# Altium PCB USBasp_下载线.PCBDOC
Units mm, origin at the board's own origin, x right, y up, seen from the top; angles counter-clockwise.
Board outline 152.4 x 101.6 mm, 2 copper layers (Top Layer, Bottom Layer); 21 components, 22 nets, 84 pads, 23 vias.
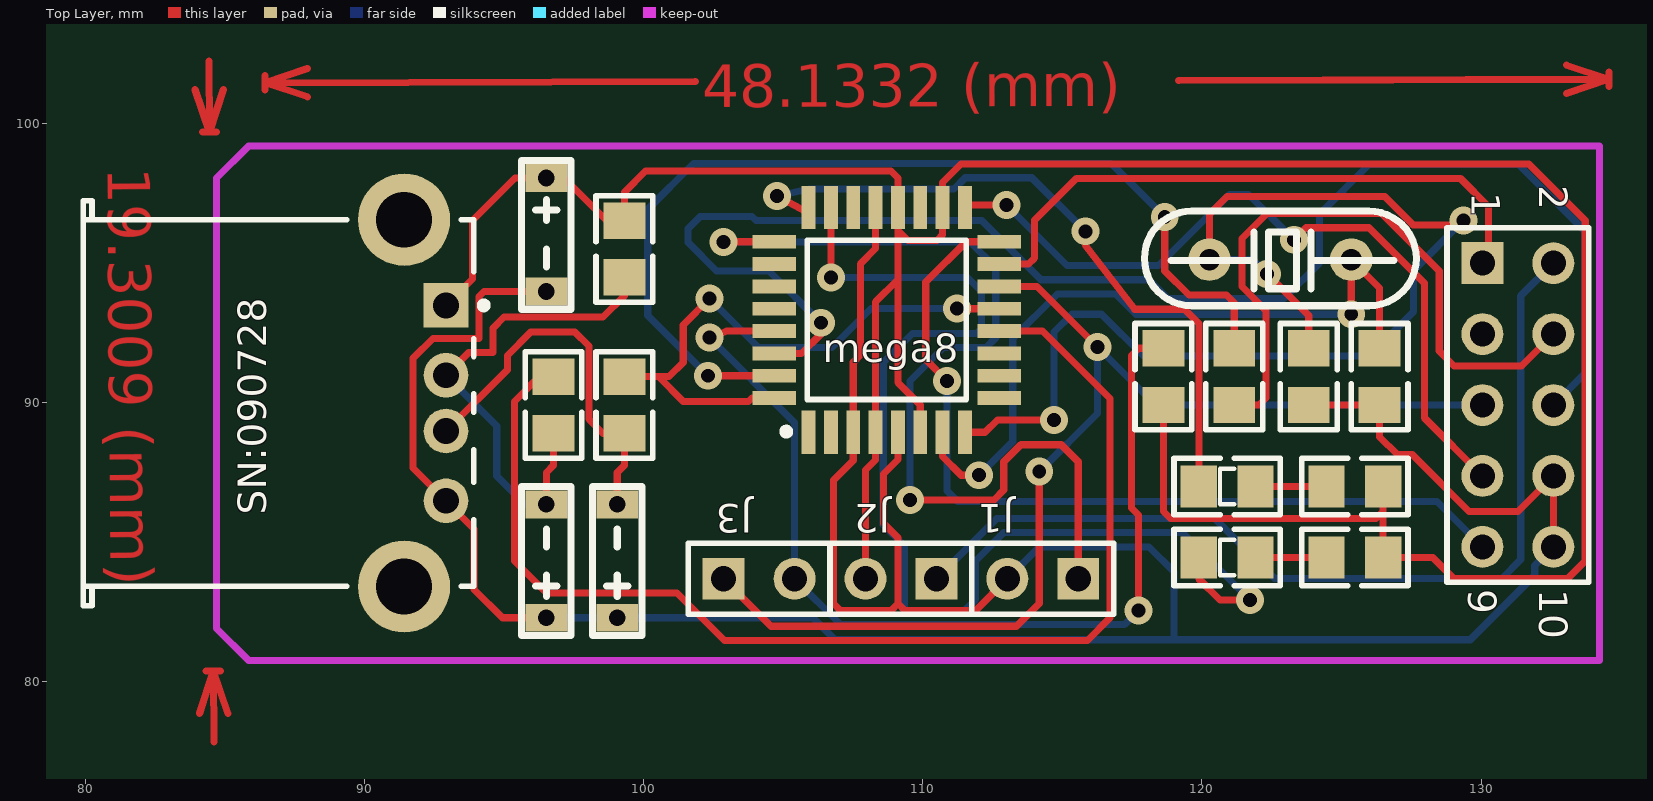
[diagram p0: Top Layer view]
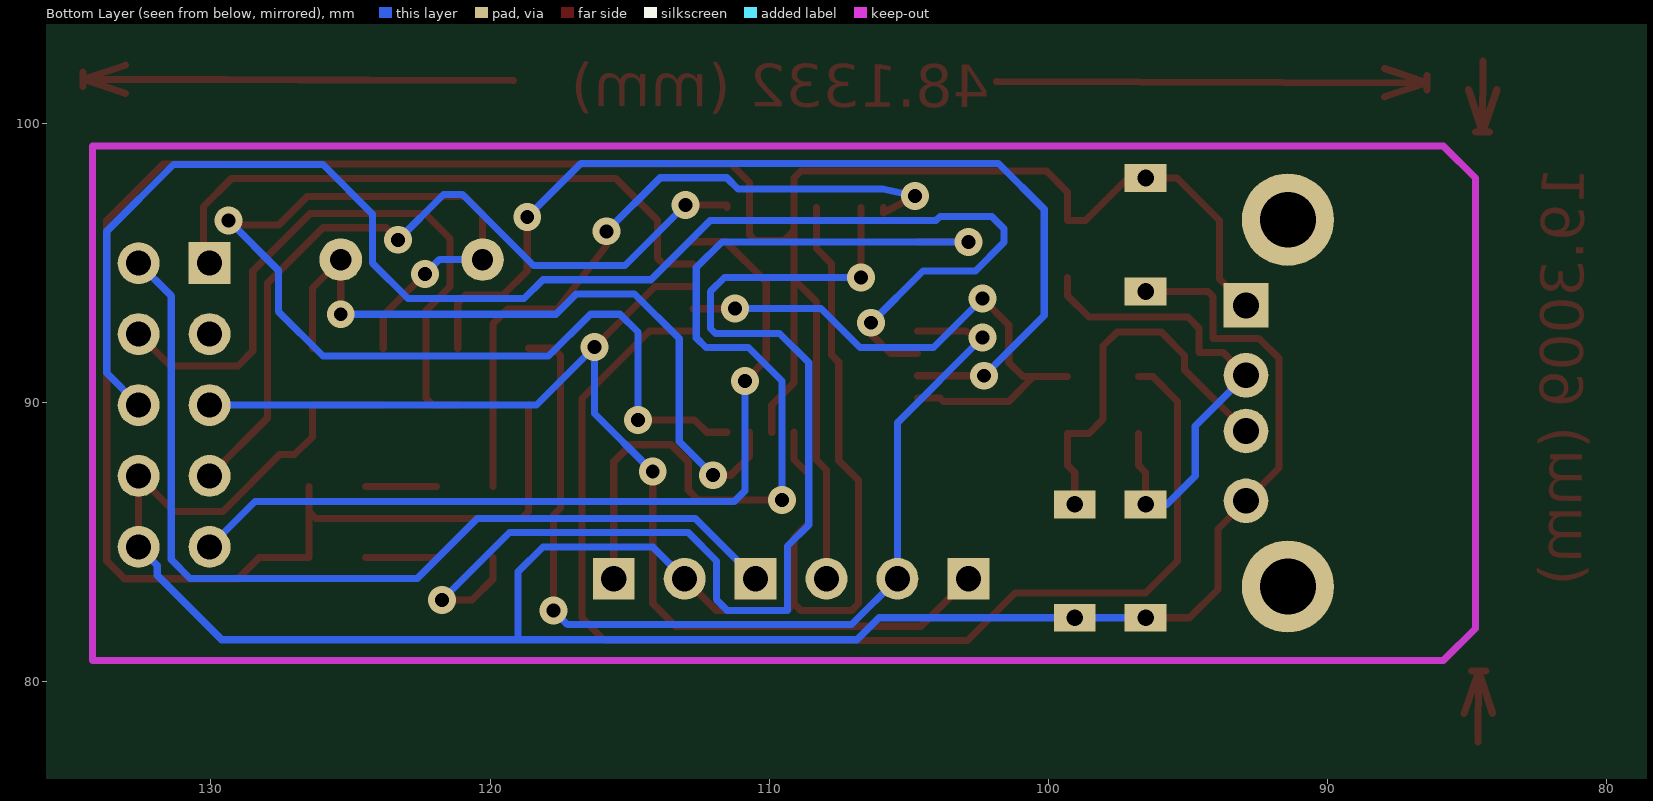
[diagram p1: Bottom Layer view, seen from below]

## Layer stack, top to bottom
Top Layer: signal copper 0.0356
Dielectric: dielectric 0.32, FR-4, Dk 4.8
Bottom Layer: signal copper 0.0356

## Board outline
25.4,25.4 177.8,25.4 177.8,127 25.4,127

## Design rules (kind name [scope] priority, off if disabled: settings)
Clearance [All] p1: gap=0.254
ComponentClearance [All] p1: gap=0.254 collisioncheckmode=3 verticalgap=0.254
PolygonConnect [All] p1: connectstyle=Relief reliefconductorwidth=0.254 reliefentries=4 polygonreliefangle="90 Angle"
RoutingVias [All] p1: holewidth=0.5 width=1 viastyle="Through Hole" minholewidth=0.5 minwidth=1 maxholewidth=0.5 maxwidth=1
SolderMaskExpansion [All] p1: expansion=0.102
TestPointUsage [All] p1: valid=0 allowmultiple=FALSE
Testpoint [All] p1: side=15 testpointundercomponent=TRUE minsize=1.016 maxsize=2.54 preferedsize=1.524 minholesize=0 maxholesize=1.016 preferedholesize=0.813 testpointgrid=0.025 style=1023 order=0-112345678
Width [All] p1: maxlimit=0.254 minlimit=0.254 preferedwidth=0.254
17 further rules are at their usual default settings.

## Components (designator, comment, footprint, x,y, rotation, side; value= is the part's Value field where it differs from the comment)
C1 "" TPDR 96.52,93.472 r270 top
C4 "" TP-0805-R 127.635,93.472 r90 top
C5 "" TP-0805-R 125.095,93.472 r90 top
D1 "Diode 11DQ03" TPDR 99.06,86.868 r90 top
D2 "Diode 11DQ03" TPDR 96.52,86.868 r90 top
ISP "" HDR2X5 130.048,94.996 r270 top
J1 "CON2" HDR1X2 115.57,83.693 r180 top
J2 "CON2" HDR1X2 110.49,83.693 r180 top
J3 "CON2" HDR1X2 102.87,83.693 r0 top
JP1 "4 HEADER" USB-5V 90.424,86.36 r180 top
LED1 "" TP-0805-D 118.364,88.265 r180 top
LED2 "" TP-0805-D 118.364,85.725 r180 top
mega8 "贴片" QFP7x7-G32/N 108.712,92.964 r90 top
R1 "" TP-0805-R 98.044,92.456 r90 top
R2 "" TP-0805-R 98.044,87.376 r270 top
R3 "" TP-0805-R 100.584,98.044 r90 top
R4 "" TP-0805-R 128.016,83.185 r0 top
R5 "" TP-0805-R 128.016,85.725 r0 top
R6 "" TP-0805-R 117.348,88.392 r270 top
R7 "" TP-0805-R 122.428,93.472 r90 top
Y1 "XTAL" JZ_ZC 120.269,95.123 r180 top

## Footprints (in the part's own frame and the unit in brackets; to place one, negate y for a bottom-side part, rotate by r counter-clockwise, add the part's x,y. Pads: shape width x height; smd on the part's side, far side on the other; paste and mask are expansions set on the pad)
HDR1X2 [mm] "Connector; Header; 2 Position"
  rect 1.5x1.5 hole 0.9: 1(0,0)
  round 1.5 hole 0.9: 2(2.54,0)
  silkscreen extent -1.27,-1.27 3.81,1.27
HDR2X5 [mm] "Connector; Header; 5x2 Position"
  rect 1.5x1.5 hole 0.9: 1(0,0)
  round 1.5 hole 0.9: 2(0,2.54) 3(2.54,0) 4(2.54,2.54) 5(5.08,0) 6(5.08,2.54) 7(7.62,0) 8(7.62,2.54) 9(10.16,0) 10(10.16,2.54)
  silkscreen extent -1.27,-1.27 11.43,3.81
JZ_ZC [mil] "晶振"
  round 60 hole 30: 1(-200,0) 2(0,0)
  silkscreen extent -292,-68 92,65
QFP7x7-G32/N [mm] "贴片mega8"
  rect 1.55x0.5 smd: 1(-4.025,2.8) 2(-4.025,2) 3(-4.025,1.2) 4(-4.025,0.4) 5(-4.025,-0.4) 6(-4.025,-1.2) 7(-4.025,-2) 8(-4.025,-2.8) 17(4.025,-2.8) 18(4.025,-2) 19(4.025,-1.2) 20(4.025,-0.4) 21(4.025,0.4) 22(4.025,1.2) 23(4.025,2) 24(4.025,2.8)
  rect 0.5x1.55 smd: 9(-2.8,-4.025) 10(-2,-4.025) 11(-1.2,-4.025) 12(-0.4,-4.025) 13(0.4,-4.025) 14(1.2,-4.025) 15(2,-4.025) 16(2.8,-4.025) 25(2.8,4.025) 26(2,4.025) 27(1.2,4.025) 28(0.4,4.025) 29(-0.4,4.025) 30(-1.2,4.025) 31(-2,4.025) 32(-2.8,4.025)
  silkscreen extent -4.12,-2.85 2.85,3.72
TP-0805-D [mm] "贴片二极管"
  rect 1.3x1.5 smd: 1(-3.556,1.27) 2(-1.524,1.27)
  silkscreen extent -4.44,0.25 -0.64,2.29
TP-0805-R [mm] "贴片0805"
  rect 1.3x1.5 smd: 1(-3.556,1.27) 2(-1.524,1.27)
  silkscreen extent -4.44,0.25 -0.64,2.29
TPDR [mm] "贴片电容"
  rect 1x1.5 hole 0.6: 1(-4.572,0) 2(-0.508,0)
  silkscreen extent -5.21,-0.89 0.13,0.89
USB-5V [mm] "USB接口"
  rect 1.6x1.6 hole 0.92: 1(-2.503,-7.123)
  round 1.6 hole 0.92: 2(-2.503,-4.624) 3(-2.503,-2.624) 4(-2.503,-0.124)
  round 3.3 hole 2: 5(-1.002,2.947) 6(-1.002,-10.193)
  silkscreen extent -3.98,-10.87 10.5,3.63

## Part data
C1: library part "Cap Pol2", "Polarized Capacitor (Axial)"
C4 C5: library part CAPSMD, "Capacitor SMD1206"
D1 D2: "Schottky Rectifier"
ISP: library part MLW10A, "Header, 5-Pin, Dual row, Right Angle"
J1 J2 J3: "Connector"
JP1: "4 Pin Header"
LED1: library part "LED Piros", "Piros Led 3mm"
LED2: library part "LED Zöld", "Zöld Led 3mm"
mega8: library part ATmega8-A, "8 位微处理器/32引脚"
R1 R2 R3 R4 R5 R6 R7: library part RES, "Resistor SMD1206, 1% fémréteg"
Y1: "Crystal Oscillator"

## Via types
v1: diameter 1, hole 0.5, Top Layer to Bottom Layer, 23 vias

## Nets (pads, with @x,y where several pads share a name; then routed paths per layer and width w, separated by ;. In a path a pad name is that pad's centre, name@x,y a point inside that pad or via, vN(x,y) a via of type N, cw(c..) or ccw(c..) an arc to the next point about the centre after c; other vN are vias at no path point)
GND: C1.2 C4.1 C5.1 D1.1 D2.1 ISP.8 ISP.10 J1.2 JP1.4 mega8.3 mega8.5 mega8.21 | length 108.5
  Top Layer w0.254: D2.1 94.945,82.296 93.929,83.312 93.929,85.481 JP1.4 91.745,87.665 91.745,91.591 92.456,92.302 94.108,92.302 94.108,93.803 94.285,93.98 C1.2 ; mega8.21 108.312,95.519 107.764,94.971 107.764,91.702 107.512,91.45 mega8.3 107.512,87.929 106.807,87.224 106.807,82.804 107.061,82.55 108.858,82.55 109.112,82.804 ; mega8.5 109.112,87.963 108.593,87.444 108.593,85.681 109.112,85.162 109.112,82.804 ; J1.2 111.887,82.55 109.366,82.55 109.112,82.804 ; C5.1 C4.1 126.365,88.773 127,88.138 127.533,88.138 129.565,86.106 131.318,86.106 ISP.8 ISP.10
  Bottom Layer w0.254: D2.1 D1.1 106.07,82.296 106.858,81.509 129.609,81.509 131.921,83.82 131.921,84.169 ISP.10 ; J1.2 114.173,84.836 118.11,84.836 118.999,83.947 118.999,81.509
MISO: ISP.9 mega8.16 | length 31
  Top Layer w0.254: v1(110.871,90.78) 110.109,91.542 110.109,94.316 111.557,95.764 mega8.16
  Bottom Layer w0.254: v1(110.871,90.78) 110.871,86.843 111.252,86.462 128.422,86.462 ISP.9
MOSI: ISP.1 mega8.15 | length 22.1
  Top Layer w0.254: mega8.15 113.792,94.964 114.003,95.175 114.003,96.533 115.506,98.036 129.253,98.036 130.261,97.028 130.261,95.209 ISP.1
NetD1_2: D1.2 JP1.3 R2.2 | length 13.8
  Top Layer w0.254: JP1.3 95.124,91.181 95.124,91.695 95.961,92.532 97.536,92.532 98.044,92.024 98.044,89.408 98.552,88.9 R2.2 99.314,87.757 99.06,87.503 D1.2
NetD2_2: D2.2 JP1.2 R1.1 R3.1 | length 17.9
  Top Layer w0.254: JP1.2 93.737,91.794 94.616,91.794 94.616,92.673 95.009,93.066 98.552,93.066 99.314,93.828 R3.1 ; D2.2 96.52,87.503 96.774,87.757 R1.1
  Bottom Layer w0.254: JP1.2 94.742,89.168 94.742,87.376 95.758,86.36 D2.2
NetISP_2: ISP.2 J2.1 | length 34.1
  Bottom Layer w0.254: J2.1 112.649,85.852 120.459,85.852 122.606,83.705 130.746,83.705 131.42,84.379 131.42,93.828 ISP.2
NetISP_4: ISP.4 R7.1 | length 23.3
  Top Layer w0.254: R7.1 122.047,89.916 122.301,90.17 122.301,93.294 121.437,94.158 121.437,95.885 122.326,96.774 126.441,96.774 128.499,94.717 128.499,91.846 129.032,91.313 131.445,91.313 ISP.4
NetJ1_1: J1.1 mega8.25 | length 34.3
  Top Layer w0.254: v1(102.87,95.758) 102.876,95.764 mega8.25 ; v1(109.542,86.512) 112.547,86.512 112.903,86.868 112.903,87.884 113.513,88.494 114.96,88.494 115.57,87.884 J1.1
  Bottom Layer w0.254: v1(102.87,95.758) 111.696,95.758 112.616,94.838 112.616,92.323 112.268,91.975 110.744,91.975 109.542,90.773 v1(109.542,86.512)
NetJ3_2: J3.2 mega8.29 R6.1 | length 36.3
  Top Layer w0.254: v1(102.362,92.329) 102.978,92.564 mega8.29 ; v1@117.475,82.804 v1(117.729,82.55) 117.729,85.979 117.475,86.233 117.475,91.694 117.729,91.948 R6.1
  Bottom Layer w0.254: v1(102.362,92.329) 105.41,89.281 J3.2 107.049,82.054 117.233,82.054 v1(117.729,82.55)
NetLED1_1: LED1.1 R5.1 | length 2.5
  Top Layer w0.254: LED1.1 R5.1
NetLED1_2: LED1.2 mega8.24 | length 25.3
  Top Layer w0.254: v1(104.775,97.409) 105.833,96.842 105.912,96.799 mega8.24 ; v1(115.824,96.139) 115.824,95.631 117.594,93.345 119.38,93.345 119.888,92.837 LED1.2
  Bottom Layer w0.254: v1(104.775,97.409) 105.935,97.655 111.12,97.655 111.522,98.057 113.906,98.057 v1(115.824,96.139)
NetLED2_1: LED2.1 R4.1 | length 2.5
  Top Layer w0.254: LED2.1 R4.1
NetLED2_2: LED2.2 mega8.23 | length 40.9
  Top Layer w0.254: v1(106.712,94.488) mega8.23 ; LED2.2 119.888,83.693 120.65,82.931 v1(121.717,82.931)
  Bottom Layer w0.254: v1(106.712,94.488) 111.608,94.488 112.108,93.988 112.108,92.659 111.931,92.483 109.628,92.483 108.585,91.44 108.585,85.623 109.347,84.861 109.347,82.562 111.506,82.562 111.887,82.943 111.887,84.328 112.903,85.344 119.304,85.344 v1(121.717,82.931)
Netmega8_12: mega8.12 R1.2 | length 43.2
  Top Layer w0.254: R1.2 96.266,90.932 95.377,90.043 95.377,84.328 96.52,83.185 101.194,83.185 102.895,81.483 115.9,81.483 116.713,82.296 116.713,90.145 114.294,92.564 mega8.12
PB1: mega8.13 mega8.32 R2.1 | length 21.2
  Top Layer w0.254: R2.1 100.533,90.932 ; v1(102.362,93.726) 101.422,92.786 101.422,91.44 100.914,90.932 100.533,90.932 ; mega8.32 103.886,90.164 103.765,90.043 101.422,90.043 100.533,90.932 ; v1(111.227,93.37) 111.233,93.364 mega8.13
  Bottom Layer w0.254: v1(102.362,93.726) 104.115,91.973 106.756,91.973 108.153,93.37 v1(111.227,93.37)
PB6: C4.2 mega8.7 Y1.1 | length 26.5
  Top Layer w0.254: mega8.7 110.712,88.068 111.379,87.401 v1(112.014,87.401) ; v1(125.349,93.167) Y1.1 126.365,94.107 C4.2
  Bottom Layer w0.254: v1(112.014,87.401) 113.224,88.612 113.224,92.299 114.821,93.896 116.916,93.896 117.645,93.167 v1(125.349,93.167)
PB7: C5.2 mega8.8 Y1.2 | length 42
  Top Layer w0.254: mega8.8 112.231,88.939 112.674,89.383 v1(114.706,89.383) ; Y1.2 120.269,96.749 120.904,97.384 126.55,97.384 127.566,96.368 129.21,96.368 v1(129.362,96.52) ; v1(122.326,94.615) 123.825,93.116 C5.2
  Bottom Layer w0.254: v1(114.706,89.383) 114.706,92.532 115.341,93.167 116.408,93.167 117.907,91.669 125.984,91.669 127.584,93.269 127.584,94.742 v1(129.362,96.52) ; Y1.2 121.818,95.123 v1(122.326,94.615)
PD0: ISP.6 mega8.30 | length 53
  Top Layer w0.254: mega8.30 105.664,91.764 106.35,92.45 v1(106.35,92.862)
  Bottom Layer w0.254: v1(106.35,92.862) 104.496,94.717 102.616,94.717 101.6,95.733 101.6,96.241 102.032,96.672 103.886,96.672 104.038,96.52 112.116,96.52 114.232,94.404 118.11,94.404 118.788,93.726 122.936,93.726 124.206,94.996 124.206,96.749 125.984,98.527 131.343,98.527 133.731,96.139 133.731,91.059 ISP.6
PD1: mega8.31 R7.2 | length 35.7
  Top Layer w0.254: v1(102.305,90.964) mega8.31 ; v1(118.669,96.647) 118.669,94.717 119.532,93.853 120.879,93.853 121.158,93.574 R7.2
  Bottom Layer w0.254: v1(102.305,90.964) 100.152,93.116 100.152,96.926 101.791,98.565 116.751,98.565 v1(118.669,96.647)
RESET: ISP.5 J3.1 mega8.14 | length 41.5
  Top Layer w0.254: J3.1 104.572,81.991 113.36,81.991 114.173,82.804 v1(114.173,87.528) ; mega8.14 114.091,94.164 v1(116.256,91.999)
  Bottom Layer w0.254: v1(114.173,87.528) 116.256,89.611 v1(116.256,91.999) 118.339,89.916 ISP.5
SCK: ISP.7 mega8.17 | length 27.9
  Top Layer w0.254: mega8.17 111.512,97.079 v1(113.005,97.079) ; v1(123.292,95.834) 123.723,96.266 125.984,96.266 127.965,94.285 127.965,89.459 ISP.7
  Bottom Layer w0.254: v1(113.005,97.079) 115.172,94.912 118.441,94.912 120.989,97.46 121.666,97.46 v1(123.292,95.834)
VCC: C1.1 J2.2 JP1.1 mega8.4 mega8.6 mega8.18 mega8.20 R3.2 R4.2 R5.2 R6.2 | length 104.3
  Top Layer w0.254: JP1.1 93.878,94.435 93.878,96.52 95.402,98.044 C1.1 97.155,98.044 98.679,96.52 R3.2 99.314,97.536 100.076,98.298 108.858,98.298 109.112,98.044 mega8.20 109.112,96.171 ; J2.2 107.95,87.59 108.312,87.952 mega8.4 108.312,93.612 109.112,94.412 ; mega8.6 109.912,89.916 109.112,90.716 109.112,94.412 ; R6.2 118.618,86.106 118.872,85.852 126.238,85.852 126.492,86.106 ; R5.2 126.492,86.106 ; 109.112,94.412 109.112,96.171 ; 109.112,96.171 109.474,95.809 110.509,95.809 110.712,96.012 mega8.18 110.712,97.885 111.371,98.544 131.707,98.544 133.731,96.52 133.731,84.328 133.096,83.693 129.032,83.693 128.27,84.455 R4.2 126.492,86.106
pads on no net: ISP.3 JP1.5 JP1.6 mega8.1 mega8.2 mega8.9 mega8.10 mega8.11 mega8.19 mega8.22 mega8.26 mega8.27 mega8.28
copper on no net: | length 50.8
  Top Layer w0.254: 83.936,101.215 84.455,99.695 ; 84.096,78.867 84.593,80.395 ; 84.201,99.693 84.709,99.697 ; 84.339,80.393 84.847,80.396 ; 84.437,102.235 84.455,99.695 ; 84.611,77.855 84.593,80.395 ; 84.952,101.223 84.455,99.695 ; 85.112,78.874 84.593,80.395 ; 86.443,101.711 86.444,101.203 ; 87.966,101.969 86.444,101.457 ; 87.969,100.953 86.444,101.457 ; 101.852,101.497 86.444,101.457 ; 119.169,101.543 134.577,101.584 ; 133.051,102.088 134.577,101.584 ; 133.054,101.072 134.577,101.584 ; 134.576,101.838 134.577,101.33

## Keep-outs
Keep-Out Layer:
  lines w0.254: 84.709,81.915 84.709,98.044 85.852,99.187 134.239,99.187 134.239,80.772 85.852,80.772 84.709,81.915

## Other copper
Top Layer:
  text "48.1332 (mm)" at 102.108,100.584 h1.52 r0.15
  text "19.3009 (mm)" at 80.807,98.423 h1.52 r270.41

## Silkscreen, mask and mechanical layers (free items; w line width, h text height)
Top Overlay:
  text "SN:090728" at 86.487,85.979 h1.02 r90
Mechanical 1:
  lines w0.254: 84.455,81.788 85.725,80.518 134.493,80.518 134.493,81.026 134.493,98.806 134.493,99.441 85.725,99.441 84.582,98.298 84.455,98.171 84.455,82.169 84.455,81.788

## Text inside footprints (layer, text, board x,y; h text height)
ISP: Top Overlay "10" at 132.08,83.312 h1.02 r270; Top Overlay "9" at 129.54,83.312 h1.02 r270; Top Overlay "1" at 129.667,97.536 h1.02 r270; Top Overlay "2" at 132.08,97.79 h1.02 r270